# EAGLE board mewa (EAGLE 9.6.2)

Size 160 x 100 mm. Coordinates in mm from the lower left corner, seen from the top.
Outline: 0,0 160,0 160,100 0,100 0,0
Copper layers (1*16): Top 0.035mm / dielectric 0.15mm / Bottom 0.035mm
Design rules "default": minimum track width 6mil, minimum drill 0.35mm, track to track 6mil, track to pad 6mil, pad to pad 6mil, via to via 6mil, smd to smd 6mil, copper to edge 40mil, drill to drill 6mil, minimum pad ring 10mil, minimum via ring 8mil, stop-mask expansion 4mil, vias tented up to drill 0mil, thermal gap 10mil

## Footprints (pad centres in the part's own frame; a part is rotated, then mirrored left to right if it is on the bottom)
BOSS_JACK = drill 0.7 square: CLOSE 2.54,0; PIN -2.54,-2.54; SLEEVE 0,2.54
C0805 = smd 1.3 x 1.5: 1 -0.95,0; 2 0.95,0
E2,5-6E = drill 0.813 pad 1.575: + -1.27,0 | drill 0.813 pad 1.575 octagon: - 1.27,0
E2,5-7 = drill 0.813 pad 1.6: + -1.27,0 | drill 0.813 pad 1.6 octagon: - 1.27,0
SOD80C = smd 1.4 x 1.8: 1 -1.7,0; 2 1.7,0
SO08 = smd 0.6 x 2.2: 1 -1.905,-2.6; 2 -0.635,-2.6; 3 0.635,-2.6; 4 1.905,-2.6; 5 1.905,2.6; 6 0.635,2.6; 7 -0.635,2.6; 8 -1.905,2.6
SOP65P640X120-24N = smd 1.45 x 0.45: 1 -2.925,3.575; 2 -2.925,2.925; 3 -2.925,2.275; 4 -2.925,1.625; 5 -2.925,0.975; 6 -2.925,0.325; 7 -2.925,-0.325; 8 -2.925,-0.975; 9 -2.925,-1.625; 10 -2.925,-2.275; 11 -2.925,-2.925; 12 -2.925,-3.575; 13 2.925,-3.575; 14 2.925,-2.925; 15 2.925,-2.275; 16 2.925,-1.625; 17 2.925,-0.975; 18 2.925,-0.325; 19 2.925,0.325; 20 2.925,0.975; 21 2.925,1.625; 22 2.925,2.275; 23 2.925,2.925; 24 2.925,3.575
SO08' = smd 0.66 x 2.032: 1 -1.905,-3.073; 2 -0.635,-3.073; 3 0.635,-3.073; 4 1.905,-3.073; 5 1.905,3.073; 6 0.635,3.073; 7 -0.635,3.073; 8 -1.905,3.073
NMJ6HCD2 = drill 0.7: R 0,8.115; RN 0,-8.115; S 6.35,8.115; SN 6.35,-8.115; T -6.35,8.115; TN -6.35,-8.115
1X02 = drill 1.016 long: 1 -1.27,0; 2 1.27,0
1X03 = drill 1.016 long: 1 -2.54,0; 2 0,0; 3 2.54,0
0207/10 = drill 0.813 octagon: 1 -5.08,0; 2 5.08,0
M0805 = smd 1.3 x 1.6: 1 -0.95,0; 2 0.95,0
SOT23 = smd 1 x 1.4: 1 -0.95,-1.1; 2 0.95,-1.1; 3 0,1.1

## Placement (x,y rotation side)
9V_CONN  [BOSS_JACK]  -73.66,27.94 0 top  (outside the outline)
C1  1n  [C0805]  -40.64,72.39 0 top  (outside the outline)
C2  470p  [C0805]  -36.83,52.07 0 top  (outside the outline)
C3  47n  [C0805]  -76.2,66.04 0 top  (outside the outline)
C4  100n  [C0805]  -43.18,52.07 0 top  (outside the outline)
C5  100n  [C0805]  -49.53,52.07 0 top  (outside the outline)
C6  100n  [C0805]  -55.88,52.07 0 top  (outside the outline)
C7  1n  [C0805]  -45.72,72.39 0 top  (outside the outline)
C8  470p  [C0805]  -62.23,52.07 0 top  (outside the outline)
C9  100p  [C0805]  -68.58,52.07 0 top  (outside the outline)
C10  10u  [E2,5-6E]  -20.32,52.07 0 top  (outside the outline)
C11  1n  [C0805]  -66.04,66.04 0 top  (outside the outline)
C12  470p  [C0805]  -74.93,52.07 0 top  (outside the outline)
C13  100n  [C0805]  -16.51,59.69 0 top  (outside the outline)
C14  100n  [C0805]  -22.86,59.69 0 top  (outside the outline)
C15  100n  [C0805]  -29.21,59.69 0 top  (outside the outline)
C16  100n  [C0805]  -35.56,59.69 0 top  (outside the outline)
C17  100n  [C0805]  -41.91,59.69 0 top  (outside the outline)
C18  1n  [C0805]  -15.24,66.04 0 top  (outside the outline)
C19  470p  [C0805]  -48.26,59.69 0 top  (outside the outline)
C20  10u  [E2,5-6E]  -30.48,52.07 0 top  (outside the outline)
C21  100n  [C0805]  -88.9,-13.97 0 top  (outside the outline)
C22  100n  [C0805]  -88.9,-19.05 0 top  (outside the outline)
C23  470u  [E2,5-7]  -86.36,-24.13 0 top  (outside the outline)
C24  100u  [E2,5-7]  -86.36,-31.75 0 top  (outside the outline)
C25  100u  [E2,5-7]  -86.36,-44.45 0 top  (outside the outline)
C26  100n  [C0805]  -88.9,-52.07 0 top  (outside the outline)
C27  10u  [E2,5-7]  -86.36,-59.69 0 top  (outside the outline)
C28  10u  [E2,5-6E]  -87.63,-67.31 0 top  (outside the outline)
C29  10u  [E2,5-6E]  -87.63,-73.66 0 top  (outside the outline)
C30  1u FILM  [C0805]  -88.9,-80.01 0 top  (outside the outline)
C31  1u FILM  [C0805]  -88.9,-86.36 0 top  (outside the outline)
D1  PMLL4148L  [SOD80C]  -66.04,72.39 0 top  (outside the outline)
D2  PMLL4148L  [SOD80C]  -76.2,72.39 0 top  (outside the outline)
IC1  TL072D  [SO08]  -17.78,43.18 0 top  (outside the outline)
IC2  TL072D  [SO08]  -27.94,43.18 0 top  (outside the outline)
IC3  TL072D  [SO08]  -38.1,43.18 0 top  (outside the outline)
IC4  TL072D  [SO08]  -48.26,43.18 0 top  (outside the outline)
IC5  CS4270-CZZR  [SOP65P640X120-24N]  -59.69,43.18 0 top  (outside the outline)
IC6  ICL7660CSA  [SO08']  -86.36,5.08 0 top  (outside the outline)
J1  STEREOSW  [NMJ6HCD2]  -26.67,10.16 0 top  (outside the outline)
J2  STEREOSW  [NMJ6HCD2]  -54.61,10.16 0 top  (outside the outline)
J3  STEREOSW  [NMJ6HCD2]  -26.67,29.21 0 top  (outside the outline)
J4  STEREOSW  [NMJ6HCD2]  -54.61,29.21 0 top  (outside the outline)
JP1  [1X02]  -52.07,77.47 0 top  (outside the outline)
JP2  [1X03]  -17.78,77.47 0 top  (outside the outline)
JP3  [1X03]  -26.67,77.47 0 top  (outside the outline)
JP4  [1X03]  -35.56,77.47 0 top  (outside the outline)
JP5  [1X03]  -44.45,77.47 0 top  (outside the outline)
L1  100u  [0207/10]  -85.09,-3.81 0 top  (outside the outline)
L2  100u  [0207/10]  -85.09,-8.89 0 top  (outside the outline)
L3  100u  [0207/10]  -85.09,-39.37 0 top  (outside the outline)
R1  12k  [M0805]  -15.24,72.39 0 top  (outside the outline)
R2  8.2k  [M0805]  -53.34,59.69 0 top  (outside the outline)
R3  10k  [M0805]  -20.32,72.39 0 top  (outside the outline)
R4  5.2k  [M0805]  -58.42,59.69 0 top  (outside the outline)
R5  1k  [M0805]  -50.8,72.39 0 top  (outside the outline)
R6  1M  [M0805]  -55.88,72.39 0 top  (outside the outline)
R7  20k  [M0805]  -25.4,72.39 0 top  (outside the outline)
R8  20k  [M0805]  -30.48,72.39 0 top  (outside the outline)
R9  12k  [M0805]  -35.56,72.39 0 top  (outside the outline)
R10  8.2k  [M0805]  -63.5,59.69 0 top  (outside the outline)
R11  20k  [M0805]  -71.12,66.04 0 top  (outside the outline)
R12  20k  [M0805]  -20.32,66.04 0 top  (outside the outline)
R13  12k  [M0805]  -25.4,66.04 0 top  (outside the outline)
R14  8.2k  [M0805]  -68.58,59.69 0 top  (outside the outline)
R15  1k  [M0805]  -30.48,66.04 0 top  (outside the outline)
R16  1M  [M0805]  -35.56,66.04 0 top  (outside the outline)
R17  12k  [M0805]  -40.64,66.04 0 top  (outside the outline)
R18  8.2k  [M0805]  -73.66,59.69 0 top  (outside the outline)
R19  8.2k  [M0805]  -78.74,59.69 0 top  (outside the outline)
R20  10k  [M0805]  -45.72,66.04 0 top  (outside the outline)
R21  10k  [M0805]  -50.8,66.04 0 top  (outside the outline)
R22  1k  [M0805]  -55.88,66.04 0 top  (outside the outline)
R23  1k  [M0805]  -60.96,66.04 0 top  (outside the outline)
T1  PDTA114ET  [SOT23]  -66.04,77.47 0 top  (outside the outline)
T2  PDTA114ET  [SOT23]  -78.74,77.47 0 top  (outside the outline)
T3  BC847  [SOT23]  -71.12,43.18 0 top  (outside the outline)
T4  BC847  [SOT23]  -78.74,43.18 0 top  (outside the outline)

## Library data of the parts
9V_CONN J1-J4 = gm-jacks
C1-C31 = rcl; SPICEPREFIX: C
D1 D2 = NXP_60_26022015; FARNELL: 1097176
IC1-IC4 = linear
IC5 = CS4270-CZZR; ARROW_PART_NUMBER: CS4270-CZZR; DESCRIPTION: Interface - CODECs IC 105dB 192kHz Stereo Codec; HEIGHT: 1.2mm; MANUFACTURER_NAME: Cirrus Logic; MANUFACTURER_PART_NUMBER: CS4270-CZZR; MOUSER_PART_NUMBER: 777-CS4270-CZZR; MOUSER_PRICE-STOCK: https://www.mouser.co.uk/ProductDetail/Cirrus-Logic/CS4270-CZZR?qs=bUPhaerQQeGUCIrqegOqfg%3D%3D
IC6 = maxim; MF: MAXIM; MPN: ICL7660CSA; OC_FARNELL: 9724710; OC_NEWARK: 34C3732
JP1-JP5 = pinhead
L1-L3 = rcl; SPICEPREFIX: L
R1-R23 = rcl; SPICEPREFIX: R
T1 T2 = NXP_60_26022015
T3 T4 = transistor

## Nets
#MUTEA: IC5.21 T1.1
#MUTEB: IC5.24 T2.1
+3V3: R7.2
+AVCC: C4.2 C14.2 C16.2 C25.+ C26.1 D1.1 IC1.8 IC2.8 IC3.8 L2.2 T1.2 T2.2
-AVCC: C5.2 C15.2 C17.2 C29.- C31.1 D2.2 IC1.4 IC2.4 IC3.4 L3.2
CODEC_IN_A: C1.2 IC1.6 IC1.7 IC5.15
CODEC_IN_B: C11.2 IC3.6 IC3.7 IC5.16
CODEC_OUT_A: IC5.22 R9.1
CODEC_OUT_B: IC5.23 R17.1
GND: 9V_CONN.SLEEVE C2.1 C4.1 C5.1 C6.1 C8.1 C12.1 C14.1 C15.1 C16.1 C17.1 C19.1 C21.2 C22.2 C23.- C24.- C25.- C26.2 C28.+ C29.+ C30.2 C31.2 IC2.3 IC6.3 J1.R J1.S J1.TN J2.R J2.S J3.S J4.S JP1.1 JP2.3 JP3.3 JP4.3 JP5.3 R6.1 R16.1 R19.1 R20.1 R21.1 T3.2 T4.2
GUITAR_SENSE: R8.1
N$1: C1.1 R1.2 R2.1
N$2: IC1.1 R1.1 R3.2
N$3: C2.2 IC1.5 R2.2
N$4: C6.2 J1.RN R7.1 R8.2
N$5: IC1.2 R3.1 R4.2
N$6: JP1.2 R4.1
N$7: IC1.3 R5.2
N$8: C3.2 R5.1 R6.2
N$9: C3.1 J1.T
N$10: C7.1 R9.2 R10.1
N$11: C8.2 IC2.5 R10.2
N$12: C9.1 IC2.2 R11.2 R12.1
N$13: C9.2 C10.+ IC2.1 R12.2
N$14: C10.- JP2.1
N$15: J3.T JP3.1 JP4.1
N$16: 9V_CONN.PIN C21.1 C23.+ L1.1
N$17: C11.1 R13.2 R14.1
N$18: J2.TN J3.TN
N$19: C12.2 IC3.5 R14.2
N$20: IC3.1 IC3.2 R13.1
N$21: C13.1 R15.1
N$22: D1.2 D2.1 IC3.3 R15.2 R16.2
N$23: C13.2 JP3.2 JP4.2
N$24: C18.1 R17.2 R18.1
N$25: C19.2 IC4.5 R18.2
N$26: C20.- J4.T R19.2
N$27: C27.+ IC6.2
N$28: C27.- IC6.4
N$29: C20.+ IC4.1 IC4.2
N$30: C28.- C30.1 IC6.5 L3.1
N$31: R20.2 R22.2 T1.3
N$32: R21.2 R23.2 T2.3
N$35: R22.1 T3.1
N$36: R23.1 T4.1
OUT_POT: IC4.3 JP5.2 T4.3
SEND_OUT: J2.T JP2.2 T3.3
T: C7.2 IC2.6 IC2.7 R11.1
TT: C18.2 IC4.6 IC4.7 JP5.1
V+: C22.1 C24.+ IC4.8 IC6.8 L1.2 L2.1
V-: IC4.4

## Tracks (layer width: path | path; a pad name or v marks a point on that pad's centre or on a via)
#MUTEA  (1 unrouted)
#MUTEB  (1 unrouted)
+AVCC  (11 unrouted)
-AVCC  (9 unrouted)
CODEC_IN_A  (3 unrouted)
CODEC_IN_B  (3 unrouted)
CODEC_OUT_A  (1 unrouted)
CODEC_OUT_B  (1 unrouted)
GND  (42 unrouted)
N$1  (2 unrouted)
N$2  (2 unrouted)
N$3  (2 unrouted)
N$4  (3 unrouted)
N$5  (2 unrouted)
N$6  (1 unrouted)
N$7  (1 unrouted)
N$8  (2 unrouted)
N$9  (1 unrouted)
N$10  (2 unrouted)
N$11  (2 unrouted)
N$12  (3 unrouted)
N$13  (3 unrouted)
N$14  (1 unrouted)
N$15  (2 unrouted)
N$16  (3 unrouted)
N$17  (2 unrouted)
N$18  (1 unrouted)
N$19  (2 unrouted)
N$20  (2 unrouted)
N$21  (1 unrouted)
N$22  (4 unrouted)
N$23  (2 unrouted)
N$24  (2 unrouted)
N$25  (2 unrouted)
N$26  (2 unrouted)
N$27  (1 unrouted)
N$28  (1 unrouted)
N$29  (2 unrouted)
N$30  (3 unrouted)
N$31  (2 unrouted)
N$32  (2 unrouted)
N$35  (1 unrouted)
N$36  (1 unrouted)
OUT_POT  (2 unrouted)
SEND_OUT  (2 unrouted)
T  (3 unrouted)
TT  (3 unrouted)
V+  (5 unrouted)